# Altium PCB Battery Board PCB.PcbDoc
Units mil, origin at the board's own origin, x right, y up, seen from the top; angles counter-clockwise.
Board outline 3564.03 x 3686.03 mil, 2 copper layers (Top Layer, Bottom Layer); 45 components, 29 nets, 126 pads, 24 vias.
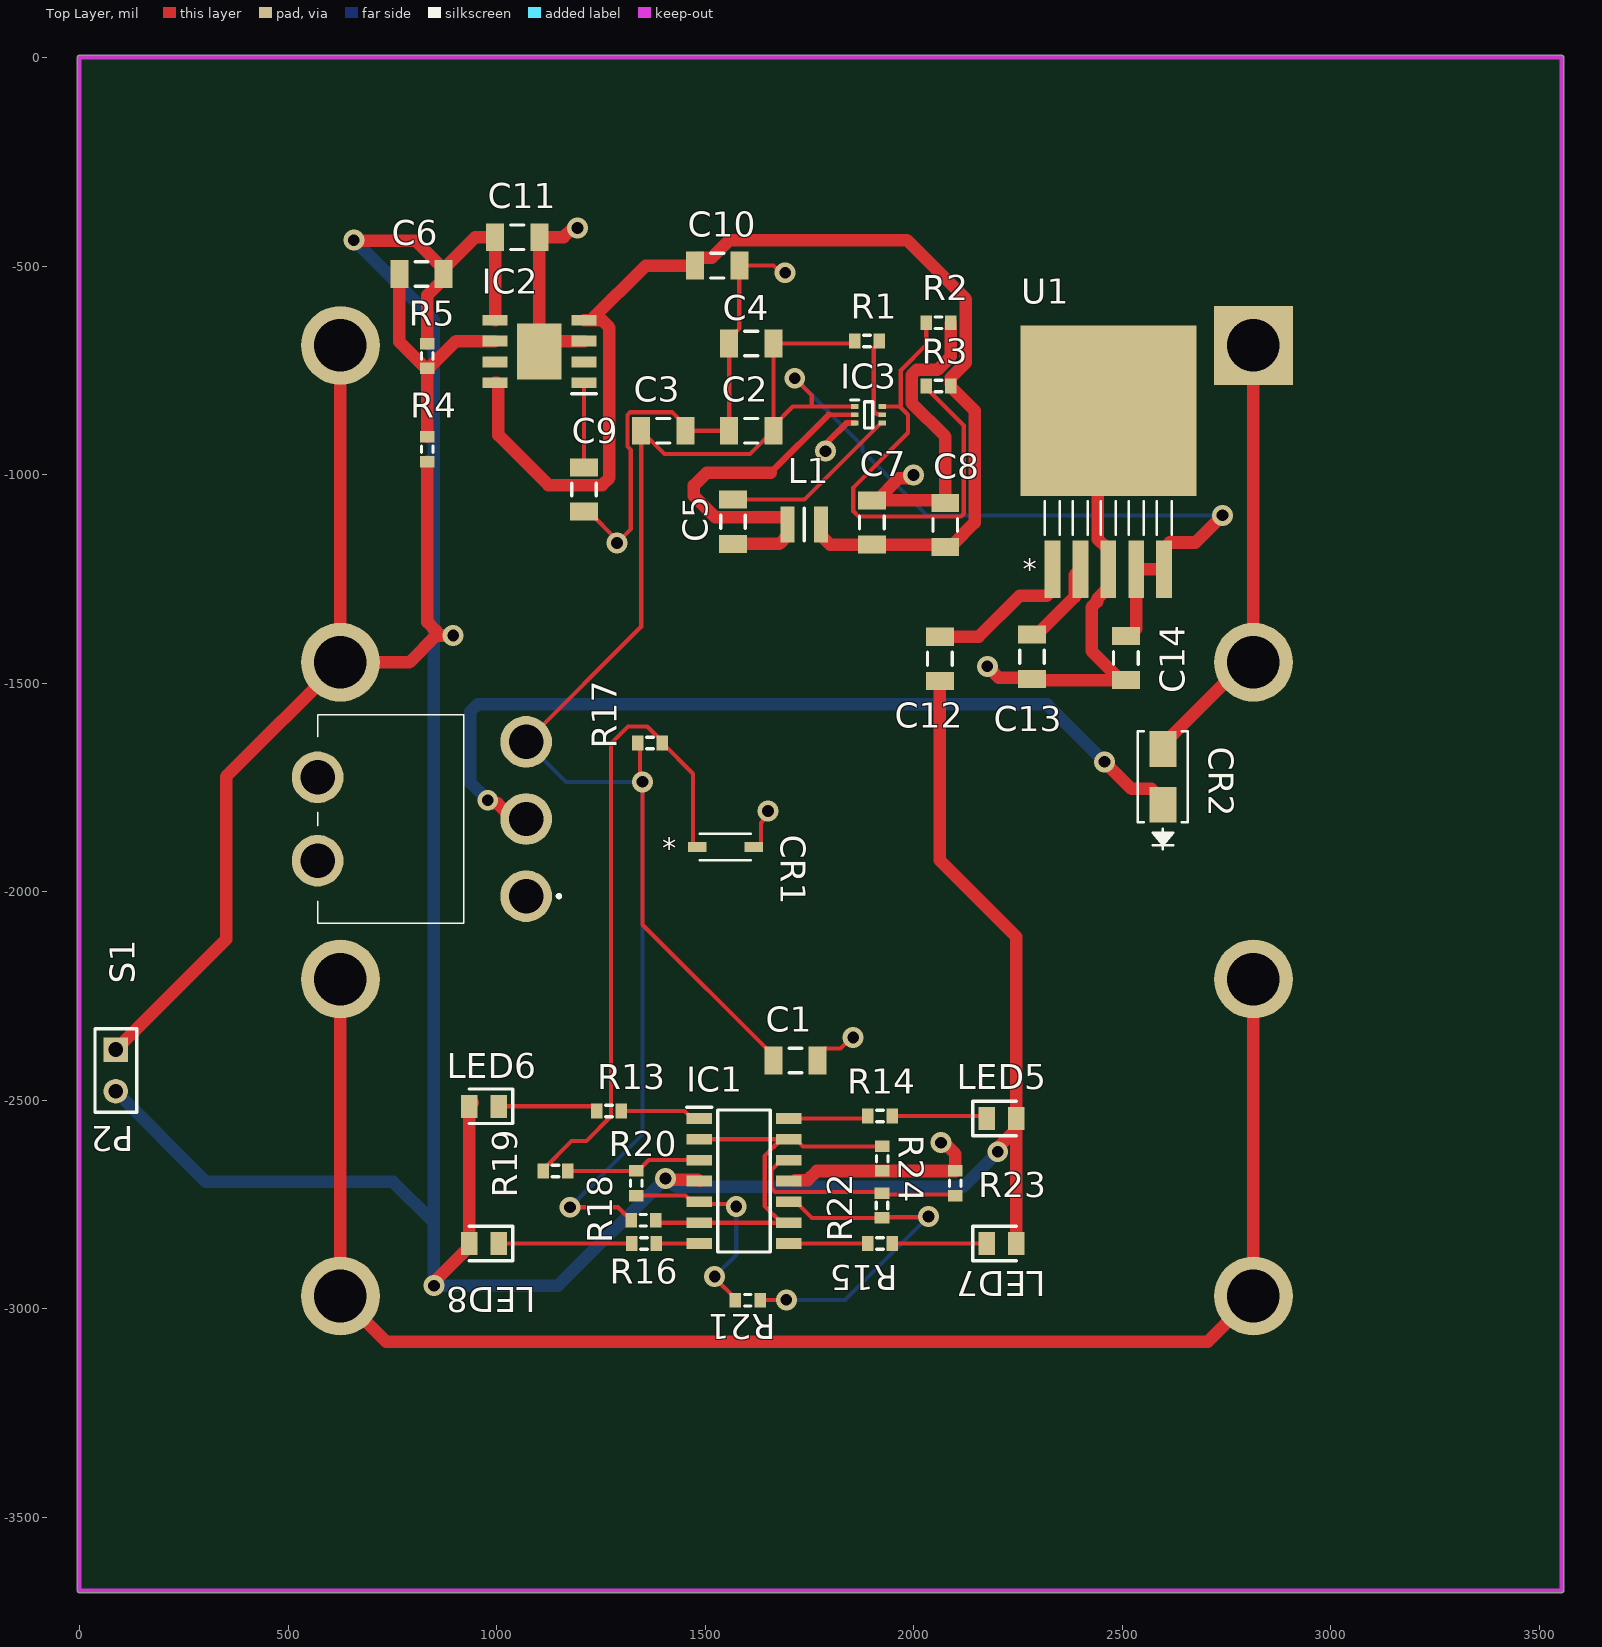
[diagram p0: Top Layer view]
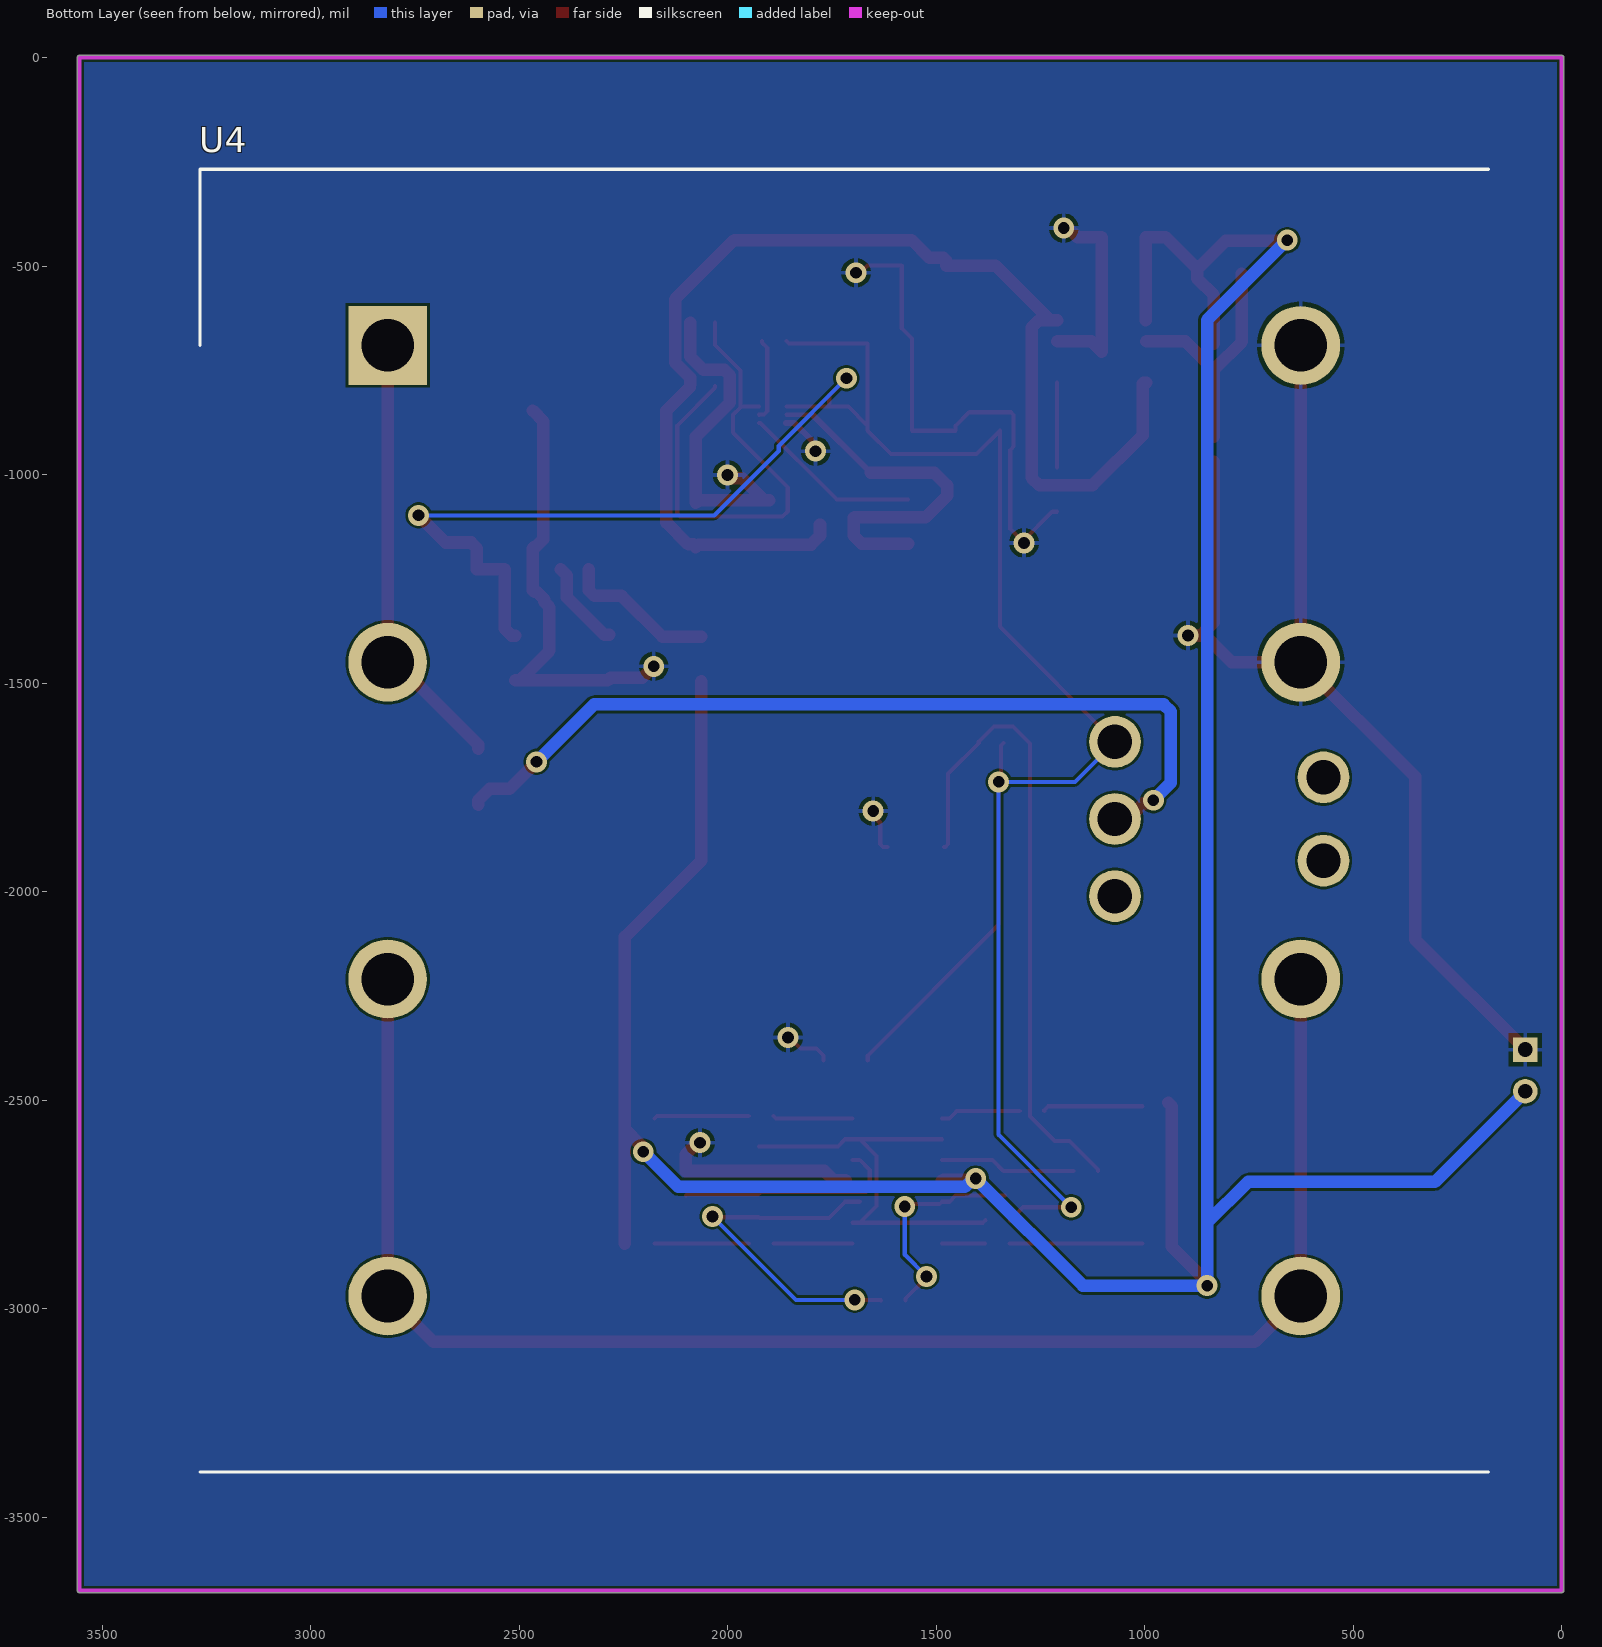
[diagram p1: Bottom Layer view, seen from below]

## Layer stack, top to bottom
Top Solder: solder mask 0.4, Solder Resist, Dk 3.5
Top Layer: signal copper 1.4
Dielectric 1: dielectric 12.6, FR-4, Dk 4.8
Bottom Layer: signal copper 1.4
Bottom Solder: solder mask 0.4, Solder Resist, Dk 3.5

## Board outline
0,-3681.01 cw(c0,-3676) -5.01,-3676 -5.01,0 cw(c0,0) 0,5.02 3554,5.02 cw(c3554,0) 3559.02,0 3559.02,-3676 cw(c3554,-3676) 3554,-3681.01

## Design rules (kind name [scope] priority, off if disabled: settings)
Clearance [All] p1: gap=6 ignorepadtopadclearanceinfootprint=FALSE
HoleSize [All] p1: absolutevalues=TRUE maxlimit=200 minlimit=1 maxpercent=80.000 minpercent=20.000
PolygonConnect [All] p1: connectstyle=Relief reliefconductorwidth=10 reliefentries=4 polygonreliefangle="90 Angle" airgapwidth=10
RoutingVias [All] p1: holewidth=28 width=50 viastyle="Through Hole" minholewidth=28 minwidth=50 maxholewidth=28 maxwidth=50
SilkToSolderMaskClearance [IsPad] p1: minsilkscreentomaskgap=2 clearancetoexposedcopper=TRUE
SolderMaskExpansion [All] p1: expansion=4 istentingtop=FALSE
Width [All] p1: maxlimit=36 minlimit=10 preferedwidth=10
28 further rules are at their usual default settings.

## Components (designator, comment, footprint, x,y, rotation, side; value= is the part's Value field where it differs from the comment)
C1 "Cap Semi" C1206 1716.85,-2405 r0 top value=1uF
C2 "Cap Semi" C1206 1611,-895 r180 top value=10uF
C3 "Cap Semi" C1206 1400,-895 r180 top value=10uF
C4 "Cap Semi" C1206 1611,-686 r0 top value=0.1uF
C5 "Cap Semi" C1206 1567,-1113 r90 top value=0.1uF
C6 "Cap Semi" C1206 820.15,-519 r0 top value=12nF
C7 "Cap Semi" C1206 1900,-1115 r270 top value=44uF
C8 "Cap Semi" C1206 2076,-1121 r270 top value=44uF
C9 "Cap Semi" C1206 1209.77,-1036 r270 top value=4.7uF
C10 "Cap Semi" C1206 1529,-499 r0 top value=4.7uF
C11 "Cap Semi" C1206 1049.85,-431 r0 top value=10uF
C12 "Cap Semi" C1206 2063,-1442.15 r90 top value=0.01uF
C13 "Cap Semi" C1206 2284,-1437.15 r270 top value=0.01uF
C14 "Cap Semi" C1206 2509,-1440 r270 top value=0.1uF
CR1 "BZT52C3V9-7-F" SOD123_DIO 1549,-1893 r0 top
CR2 "BYS10-25-E3/TR" DO-214AC_VIS 2598,-1725 r90 top
IC1 "LM324DR2G" SOIC127P600X175-14N 1593.28,-2694 r0 top
IC2 "LP3878MRX-ADJ_NOPB" SOIC127P600X170-9N 1103,-705 r180 top
IC3 "TPS562207SDRLR" SOTFL50P160X60-6N 1891.99,-856.69 r0 top
L1 "4.7uH" DFE2HCAH1R0MJ0L 1738,-1120 r0 top
LED5 "LTST-C170EKT" LEDC2012X120N 2211,-2544 r0 top
LED6 "LTST-C170EKT" LEDC2012X120N 970,-2515 r180 top
LED7 "LTST-C170EKT" LEDC2012X120N 2211,-2844 r0 top
LED8 "LTST-C170EKT" LEDC2012X120N 970,-2844 r180 top
P2 "Header 2" HDR1X2 87,-2379 r270 top
R1 "Res3" J1-0603 1888,-680 r0 top value=10K
R2 "Res3" J1-0603 2060,-636 r0 top value=10K
R3 "Res3" J1-0603 2059.53,-788 r180 top value=52K
R4 "Res3" J1-0603 834,-939.47 r270 top value=1K
R5 "Res3" J1-0603 834,-715.53 r270 top value=10K
R13 "Res3" J1-0603 1270,-2526 r0 top value="30 Ohm"
R14 "Res3" J1-0603 1919.53,-2538 r180 top value="30 Ohm"
R15 "Res3" J1-0603 1919.53,-2844 r180 top value="30 Ohm"
R16 "Res3" J1-0603 1353.47,-2844 r0 top value="30 Ohm"
R17 "Res3" J1-0603 1368,-1644 r180 top value=1K
R18 "Res3" J1-0603 1352,-2788 r180 top value=10K
R19 "Res3" J1-0603 1141.47,-2670.06 r180 top value=4.5K
R20 "Res3" J1-0603 1335,-2699.58 r90 top value=0.5K
R21 "Res3" J1-0603 1602.53,-2980 r180 top value=0.5K
R22 "Res3" J1-0603 1924,-2753 r270 top value=1.5K
R23 "Res3" J1-0603 2100,-2699.58 r270 top value=6K
R24 "Res3" J1-0603 1925,-2640.53 r90 top value=5K
S1 "100SP1T2B4M6QE" 100SP1T2B4M6QE 1071,-2011.04 r90 top
U1 "REG104FA-3.3/500" KTT5_TEX 2467,-847 r0 top
U4 "BK-18650-PC8" DIPS5561W300P1930L7884H2204Q8N 2815,-690.31 r180 bottom locked

## Footprints (in the part's own frame and the unit in brackets; to place one, negate y for a bottom-side part, rotate by r counter-clockwise, add the part's x,y. Pads: shape width x height; smd on the part's side, far side on the other; paste and mask are expansions set on the pad)
100SP1T2B4M6QE [mm]
  round 3.15 hole 2.1: 1(0,0) 2(4.7,0) 3(9.4,0) MH1(2.16,12.7) MH2(7.24,12.7)
  silkscreen extent -1.65,-2.1 11.05,12.7, body extent -1.65,-0.95 11.05,26.26, height 6.96
C1206 [mm] "Chip Capacitor, Body 3.2x1.6mm, IPC High Density"
  rect 1.1x1.7 smd: 1(-1.35,0) 2(1.35,0)
  silkscreen extent -0.4,-0.75 0.4,0.75, body extent -1.7,-0.9 1.7,0.9, height 1.3
DFE2HCAH1R0MJ0L [mm]
  rect 0.85x2.2 smd: 1(-1.025,0) 2(1.025,0)
  silkscreen extent 0,-1 0,1, body extent -1.25,-1 1.25,1, height 1.2
DIPS5561W300P1930L7884H2204Q8N [mm]
  rect 4.8x4.8 hole 3.2: 1(0,0)
  round 4.8 hole 3.2: 2(0,-19.3) 3(0,-38.6) 4(0,-57.9) 5(55.61,-57.9) 6(55.61,-38.6) 7(55.61,-19.3) 8(55.61,0)
  silkscreen extent -11.44,-68.62 67.04,10.72
DO-214AC_VIS [mil]
  rect 86x65 smd paste+0 mask+0: 1(-67,0) 2(67,0)
  silkscreen extent -174,-60 109,60, body extent -104,-55 104,55, height 92
HDR1X2 [mm] "Connector; Header; 2 Position"
  rect 1.5x1.5 hole 0.9: 1(0,0)
  round 1.5 hole 0.9: 2(2.54,0)
  silkscreen extent -1.27,-1.27 3.81,1.27
J1-0603 [mm] "Chip Resistor, Body 1.6x0.8mm, IPC High Density"
  rect 0.7x0.9 smd: 1(-0.75,0) 2(0.75,0)
  silkscreen extent -0.2,-0.35 0.2,0.35, body extent -0.85,-0.48 0.85,0.48, height 0.9
KTT5_TEX [mil]
  rect 38x138 smd paste+0 mask+0: 1(-133.86,-380) 2(-66.93,-380) 3(0,-380) 4(66.93,-380) 5(133.86,-380)
  rect 422x408 smd paste+0 mask+0: 6(0,0)
  silkscreen extent -152,-297 152,-217, body extent -210,-293 210,190, height 67
LEDC2012X120N [mm]
  rect 1x1.4 smd: 1(-0.9,0) 2(0.9,0)
  silkscreen extent -1.75,-1.05 0.9,1.05
SOD123_DIO [mm]
  rect 1.111x0.601 smd paste+0 mask+0: 1(-1.725,0) 2(1.725,0)
  silkscreen extent -1.55,-0.8 1.55,0.8, body extent -1.92,-0.67 1.92,0.67, height 0.81
SOIC127P600X170-9N [mm]
  rect 1.525x0.65 smd: 1(-2.712,1.905) 2(-2.712,0.635) 3(-2.712,-0.635) 4(-2.712,-1.905) 5(2.712,-1.905) 6(2.712,-0.635) 7(2.712,0.635) 8(2.712,1.905)
  rect 2.71x3.4 smd: 9(0,0)
  silkscreen extent -3.47,2.58 -1.95,2.58, body extent -3.01,-2.45 3.01,2.45, height 1.57
SOIC127P600X175-14N [mm]
  rect 1.55x0.65 smd: 1(-2.725,3.81) 2(-2.725,2.54) 3(-2.725,1.27) 4(-2.725,0) 5(-2.725,-1.27) 6(-2.725,-2.54) 7(-2.725,-3.81) 8(2.725,-3.81) 9(2.725,-2.54) 10(2.725,-1.27) 11(2.725,0) 12(2.725,1.27) 13(2.725,2.54) 14(2.725,3.81)
  silkscreen extent -3.5,-4.33 1.6,4.48, body extent -3,-4.33 3,4.33, height 1.75
SOTFL50P160X60-6N [mm]
  rect 0.475x0.3 smd: 1(-0.838,0.5) 2(-0.838,0) 3(-0.838,-0.5) 4(0.838,-0.5) 5(0.838,0) 6(0.838,0.5)
  silkscreen extent -1.07,-0.8 0.25,0.9, body extent -0.8,-0.8 0.8,0.8, height 0.6

## Part data
C1 C2 C3 C4 C5 C6 C7 C8 C9 C10 C11 C12 C13 C14: "Capacitor (Semiconductor SIM Model)", LatestRevisionDate=29-May-2009, LatestRevisionNote="IPC-7351 Footprint Added.", PackageDescription="Chip Capacitor", PackageReference=C1206, Published=8-Jun-2000, Publisher="Altium Limited"
CR1: "No Description Available", Mfr_Name="Diodes Inc", Copyright="Copyright (C) 2022 Ultra Librarian. All rights reserved.", Digi-Key_Part_Number_1=BZT52C3V9-FDICT-ND, Digi-Key_Part_Number_2=BZT52C3V9-FDIDKR-ND, Digi-Key_Part_Number_3=BZT52C3V9-FDITR-ND, Manufacturer_Part_Number=BZT52C3V9-7-F, RefDes=RefDes, Type=DEV
CR2: "No Description Available", Mfr_Name=Vishay, Copyright="Copyright (C) 2022 Ultra Librarian. All rights reserved.", Digi-Key_Part_Number_1=BYS10-25-E3/GICT-ND, Digi-Key_Part_Number_2=BYS10-25-E3/GIDKR-ND, Digi-Key_Part_Number_3=BYS10-25-E3/GITR-ND, Manufacturer_Part_Number=BYS10-25-E3/TR, RefDes=RefDes, Type=DEV
IC1: "Integrated Circuit", Manufacturer_Name=onsemi, Mouser Part Number=863-LM324DR2G, Arrow Part Number=LM324DR2G, Arrow Price/Stock=https://www.arrow.com/en/products/lm324dr2g/on-semiconductor?region=europe, Datasheet Link=http://www.onsemi.com/pub/Collateral/LM324-D.PDF, Height=1.75mm, Manufacturer_Part_Number=LM324DR2G, Mouser Price/Stock=https://www.mouser.co.uk/ProductDetail/onsemi/LM324DR2G?qs=2OtswVQKCOEcq0L2uFhs6w%3D%3D
IC2: "Integrated Circuit", Manufacturer_Name="Texas Instruments", Manufacturer_Part_Number=LP3878MRX-ADJ/NOPB, Mouser2 Part Number=926-LP3878MRXADJNOPB, Datasheet Link=http://www.ti.com/lit/gpn/lp3878-adj, Height=1.7mm, Mouser2 Price/Stock=https://www.mouser.com/Search/Refine.aspx?Keyword=926-LP3878MRXADJNOPB
IC3: "Integrated Circuit", Manufacturer_Name="Texas Instruments", Datasheet Link=https://www.ti.com/lit/gpn/tps562207s, Height=0.6mm, Manufacturer_Part_Number=TPS562207SDRLR
L1: library part DFE252012PD-4R7M=P2, "Inductor", Manufacturer_Name="Murata Electronics", Manufacturer_Part_Number=DFE252012PD-4R7M=P2, Mouser2 Part Number=81-DFE252012PD4R7MP2, Datasheet Link=https://componentsearchengine.com//DFE252012PD-4R7M=P2.pdf, Height=1.2mm, Mouser2 Price/Stock=https://www.mouser.com/Search/Refine.aspx?Keyword=81-DFE252012PD4R7MP2
LED5 LED6 LED7 LED8: "LED", Manufacturer_Name=Lite-On, Mouser Part Number=859-LTST-C170EKT, Arrow Part Number=LTST-C170EKT, Arrow Price/Stock=https://www.arrow.com/en/products/ltst-c170ekt/lite-on-technology, Datasheet Link=https://media.digikey.com/pdf/Data%20Sheets/Lite-On%20PDFs/LTST-C170EKT.pdf, Height=1.2mm, Manufacturer_Part_Number=LTST-C170EKT, Mouser Price/Stock=https://www.mouser.co.uk/ProductDetail/Lite-On/LTST-C170EKT?qs=0hBTvMLoVZ04yIRvO1DUlw%3D%3D
P2: "Header, 2-Pin", LatestRevisionDate=17-Jul-2002, LatestRevisionNote="Re-released for DXP Platform.", Publisher="Altium Limited"
R1 R2 R3 R4 R5 R13 R14 R15 R16 R17 R18 R19 R20 R21 R22 R23 R24: "Resistor", LatestRevisionDate=29-May-2009, LatestRevisionNote="IPC-7351 Footprint Added.", PackageDescription="Chip Resistor", PackageReference=J1-0603, Published=8-Jun-2000, Publisher="Altium Limited"
S1: "Switch", Manufacturer_Name=E-Switch, Mouser Part Number=612-100-A2461, Datasheet Link=http://spec_sheets.e-switch.com/specs/T111069.pdf, Height=6.86mm, Manufacturer_Part_Number=100SP1T2B4M6QE, Mouser Price/Stock=https://www.mouser.co.uk/ProductDetail/E-Switch/100SP1T2B4M6QE?qs=rR7wk9eDIwq%252BdlBXTZsQkg%3D%3D
U1: "No Description Available", Mfr_Name="Texas Instruments", Copyright="Copyright (C) 2022 Ultra Librarian. All rights reserved.", Digi-Key_Part_Number_1=2156-REG104FA-3.3/500-ND, Digi-Key_Part_Number_2=2156-REG104FA-3.3/500-TI-ND, Digi-Key_Part_Number_3=296-REG104FA-3.3/500CT-ND, Digi-Key_Part_Number_4=296-REG104FA-3.3/500DKR-ND, Digi-Key_Part_Number_5=296-REG104FA-3.3/500TR-ND, Digi-Key_Part_Number_6=REG104FA-3.3CT-ND, Digi-Key_Part_Number_7=REG104FA-3.3DKR-ND, Digi-Key_Part_Number_8=REG104FA-3.3TR-ND, Manufacturer_Part_Number=REG104FA-3.3/500, RefDes=RefDes, Type=DEV
U4: "Undefined or Miscellaneous", Manufacturer_Name="Memory Protection Devices", Datasheet Link=http://www.memoryprotectiondevices.com/datasheets/BK-18650-PC8-datasheet.pdf, Height=22.04mm, Manufacturer_Part_Number=BK-18650-PC8

## Via types
v1: diameter 50, hole 28, Top Layer to Bottom Layer, tented both sides, 14 vias
v2: diameter 50, hole 28, Top Layer to Bottom Layer, 10 vias

## Nets (pads, with @x,y where several pads share a name; then routed paths per layer and width w, separated by ;. In a path a pad name is that pad's centre, name@x,y a point inside that pad or via, vN(x,y) a via of type N, cw(c..) or ccw(c..) an arc to the next point about the centre after c; other vN are vias at no path point)
GND: C1.2 C2.2 C3.1 C4.1 C7.1 C8.1 C9.2 C10.2 C11.2 C13.2 C14.2 CR1.2 IC1.11 IC2.3 IC2.9 IC3.3 P2.1 R2.2 R4.2 R23.1 R24.1 U1.3 U1.6 U4.7 U4.8 | length 7050.1
  Top Layer w10: C9.2 1221.58,-1089.15 1289,-1156.57 v2@1289,-1159.14 ; v2(1289,-1164) v2@1289,-1159.14 ; CR1.2 1626.96,-1893 1633.79,-1886.17 1633.79,-1835.04 1651,-1817.82 v2(1651,-1807) ; v2(1692,-516) 1681.18,-516 1664.18,-499 C10.2 1582.15,-649.89 1557.85,-674.19 C4.1 C2.2 C3.1 1453.15,-883.19 1420.5,-850.54 1320.64,-850.54 1314.2,-856.98 1314.2,-933.02 1322,-940.82 1322,-1131 1293.86,-1159.14 v2@1289,-1159.14 ; C1.2 1770,-2393.19 1786.65,-2376.54 1824.97,-2376.54 1851.5,-2350 v2(1855,-2350)
  Top Layer w15: v2(1789,-944) 1796.65,-936.35 1796.65,-919.35 1839.63,-876.37 IC3.3
  Top Layer w30: P2.1 351.46,-2114.54 351.46,-1724.33 U4.7 ; U4.8 U4.7 ; R4.2 834,-1354.18 855,-1375.18 855,-1386 ; v1(896,-1386) 855,-1386 ; v2(1194,-409) 1183.18,-409 1161.18,-431 C11.2 IC2.9 1128,-680 IC2.3 ; IC1.11@1716.08,-2691.8 1746.2,-2691.8 1767.94,-2670.06 R24.1 ; C7.1 C7.1@1911.81,-1061.85 ; R24.1@1927.72,-2670.06 R23.1 2100,-2629.57 2076.25,-2605.83 2069.83,-2605.83 v1(2066,-2602) ; v2(2000,-1001) 1992.35,-1008.65 1965.01,-1008.65 C7.1@1911.81,-1061.85 ; R2.2 2089.53,-716.87 2057.11,-749.28 2007.52,-749.28 1995.22,-761.59 1995.22,-828.22 2076,-909 C8.1 2070,-1061.85 C7.1@1911.81,-1061.85 ; v1(2177,-1460) 2177,-1460.26 2204.57,-1487.83 2281.54,-1487.83 C13.2 2286.85,-1493.15 C14.2@2497.19,-1493.15 ; U1.6 2442.19,-871.81 2442.19,-1155.43 2459.77,-1173 2463,-1173 2467,-1177 U1.3 2467,-1277 2463,-1281 2457.64,-1281 2440.07,-1298.57 2440.07,-1304.7 2427,-1317.77 2427,-1422.96 2490.54,-1486.5 C14.2@2497.19,-1493.15 ; C14.2 C14.2@2497.19,-1493.15 ; U4.7 790.84,-1450.16 855,-1386
NetC1_1: C1.1 C2.1 C3.2 C4.2 C14.1 IC3.1 R1.1 R17.2 R18.2 S1.3 U1.4 U1.5 | length 6031
  Top Layer w10: S1.3 1346.85,-1365.11 C3.2 1402.85,-951 1608.15,-951 C2.1 C2.1@1664.15,-883.19 ; v2(1176,-2757) 1291.47,-2757 1309.76,-2775.28 1313.69,-2775.28 1322.47,-2784.06 R18.2 ; R17.2 1344.24,-1649.76 1344.24,-1731.24 v2(1350,-1737) 1350,-2079.49 1663.7,-2393.19 C1.1 ; v1(1715,-769) 1756.05,-810.05 1756.05,-837 ; R1.1 1852.47,-686 C4.2 C2.1@1664.15,-883.19 ; IC3.1 1761,-837 1710.34,-837 C2.1@1664.15,-883.19
  Top Layer w30: C14.1 2517.28,-1386.85 2533.93,-1370.2 U1.4 U1.5 2600.86,-1177 2614.86,-1163 2676,-1163 v1(2741,-1098)
  Bottom Layer w10: S1.3 1167.04,-1737 v2(1350,-1737) 1350,-2583 v2(1176,-2757) ; v1(1715,-769) 1877.33,-931.33 1877.33,-943.33 2032,-1098 v1(2741,-1098)
NetC5_1: C5.1 IC3.2 L1.1 | length 907.8
  Top Layer w10: 1796.32,-856.69 IC3.2
  Top Layer w15: 1657,-996 1796.32,-856.69
  Top Layer w30: C5.1 1678.07,-1166.15 1697.65,-1146.57 1697.65,-1104.24 1695.91,-1102.5 1524.84,-1102.5 1473.5,-1051.17 1473.5,-1026.32 1503.82,-996 1657,-996
NetC5_2: C5.2 IC3.4 | length 434
  Top Layer w10: C5.2 1738.06,-1059.85 1921.54,-876.37 IC3.4
NetC6_1: C6.1 IC2.6 R4.1 R5.2 | length 610.2
  Top Layer w30: C6.1 767,-681.99 830.06,-745.06 R5.2 ; R4.1 R5.2 ; IC2.6 902.99,-680 837.94,-745.06 R5.2
NetC7_2: C7.2 C8.2 C10.1 IC2.4 IC2.8 L1.2 R3.1 | length 2925.7
  Top Layer w30: IC2.8 1002.2,-780 1004.4,-782.2 1004.4,-905.4 1124.5,-1025.5 1253.05,-1025.5 1270.62,-1007.93 1270.62,-647.57 1253.05,-630 IC2.4@1227,-630 ; IC2.4 IC2.4@1227,-630 ; L1.2 1778.35,-1146.57 1799.93,-1168.15 C7.2 2070,-1168.15 C8.2 2082.65,-1167.5 2094.46,-1167.5 2146.46,-1115.5 2146.46,-846.91 R3.1@2090.28,-790.72 ; R3.1@2089.06,-784.06 2089.06,-768.25 2125.53,-731.78 2125.53,-579.53 1984,-438 1558.33,-438 1515.8,-480.54 1482.5,-480.54 1475.85,-487.19 C10.1 1358,-499 IC2.4@1227,-630
NetC9_1: C9.1 IC2.1 | length 202.9
  Top Layer w10: C9.1 IC2.1
NetC12_2: C12.2 U1.1 | length 366.5
  Top Layer w30: C12.2 2156.3,-1389 2254.3,-1291 2319.14,-1291 2333.14,-1277 U1.1
NetC13_1: C13.1 U1.2 | length 212
  Top Layer w30: C13.1 2295.81,-1384 2386.07,-1293.74 2386.07,-1241 U1.2
NetCR1_1: CR1.1 R17.1 R19.2 | length 1557.5
  Top Layer w10: R19.2 1111.94,-2666.12 1180.01,-2598.06 1215.47,-2598.06 1274.75,-2538.78 1274.75,-1644.88 1315.63,-1604 1361.46,-1604 1397.53,-1640.06 R17.1 1471.04,-1717.51 1471.04,-1886.17 1477.87,-1893 CR1.1
NetCR2_1: CR2.1 S1.2 | length 2114.7
  Top Layer w30: v1(979,-1781) 986.65,-1788.65 1002.8,-1788.65 1040.15,-1826 S1.2 ; v1(2458,-1689) 2523,-1754 2570.5,-1754 2598,-1781.5 CR2.1
  Bottom Layer w30: v1(979,-1781) 937,-1739 937,-1568.57 954.57,-1551 2320,-1551 v1(2458,-1689)
NetCR2_2: CR2.2 U4.1 U4.2 | length 1069.1
  Top Layer w30: CR2.2 2598,-1647.5 2795.34,-1450.16 U4.2 U4.1
NetIC1_1: IC1.1 R13.2 | length 193.9
  Top Layer w10: R13.2 1450.28,-2526 1468.28,-2544 IC1.1
NetIC1_2: IC1.2 IC1.6 IC1.9 IC1.13 R18.1 R24.2 | length 1000.5
  Top Layer w10: R18.1 1387.53,-2794 IC1.6 IC1.9@1682.85,-2794 ; IC1.2 IC1.13@1682.85,-2594 ; IC1.9 IC1.9@1682.85,-2794 ; R24.2 1735.28,-2611 1718.28,-2594 IC1.13 IC1.13@1682.85,-2594 ; IC1.9@1682.85,-2794 1643.06,-2754.2 1643.06,-2633.8 IC1.13@1682.85,-2594
NetIC1_3: IC1.3 R19.1 R20.2 | length 325.8
  Top Layer w10: R19.1 R20.2 1338.94,-2670.06 1364.99,-2644 IC1.3
NetIC1_5: IC1.5 R20.1 R21.2 | length 518
  Top Layer w10: R20.1 1453.39,-2729.11 1468.28,-2744 IC1.5 1491.5,-2749.5 1569.5,-2749.5 v1(1575,-2755) ; v1(1523,-2923) 1523,-2926.06 1573,-2976.06 R21.2
  Bottom Layer w10: v1(1523,-2923) 1575,-2871 v1(1575,-2755)
NetIC1_7: IC1.7 R16.2 | length 103
  Top Layer w10: R16.2 IC1.7
NetIC1_8: IC1.8 R15.2 | length 189.4
  Top Layer w10: IC1.8 R15.2
NetIC1_10: IC1.10 R21.1 R22.2 | length 857.8
  Top Layer w10: R21.1 1633.06,-2979 v1(1695,-2979) ; IC1.10@1682.85,-2744 IC1.10 1718.28,-2744 1756.81,-2782.53 R22.2 1925.76,-2780.76 2034.24,-2780.76 v1(2036,-2779)
  Bottom Layer w10: v1(1695,-2979) 1836,-2979 v1(2036,-2779)
NetIC1_12: IC1.12 R22.1 R23.2 | length 547.2
  Top Layer w10: IC1.12 1682.85,-2644 1659.06,-2667.8 1659.06,-2711.35 1667.91,-2720.2 1920.73,-2720.2 R22.1 ; R22.1@1927.94,-2723.47 R22.1 ; R23.2 2097.18,-2726.29 1926.82,-2726.29 R22.1
NetIC1_14: IC1.14 R14.2 | length 191.9
  Top Layer w10: IC1.14 1884,-2544 R14.2
NetIC3_5: IC3.5 R1.2 | length 197
  Top Layer w10: R1.2 1917.53,-683.94 1904.63,-696.83 1904.63,-847.46 1912.95,-855.78 1924.08,-855.78 IC3.5
NetIC3_6: IC3.6 R2.1 R3.2 | length 1199.7
  Top Layer w10: IC3.6 1969.22,-837 ; R3.2 2030,-791.94 2120.46,-882.4 2120.46,-1094.06 2114.02,-1100.5 1867.98,-1100.5 1855.54,-1088.06 1855.54,-1031.14 1986.89,-899.78 1986.89,-856.66 1969.22,-838.99 1969.22,-750.82 2030.24,-689.8 2030.24,-636.24 R2.1
NetLED5_1: LED5.1 R14.1 | length 229
  Top Layer w10: R14.1 2169.57,-2538 LED5.1
NetLED6_1: LED6.1 R13.1 | length 240.9
  Top Layer w10: LED6.1 1231.69,-2515 1240.47,-2523.78 R13.1
NetLED7_1: LED7.1 R15.1 | length 226.5
  Top Layer w10: R15.1 LED7.1
NetLED8_1: LED8.1 R16.1 | length 318.5
  Top Layer w10: LED8.1 R16.1
NetU4_3: U4.3 U4.4 U4.5 U4.6 | length 3800.3
  Top Layer w30: U4.6 U4.5 735.79,-3080 2704.84,-3080 U4.4 U4.3
VCC: C6.2 C11.1 C12.1 IC1.4 IC2.5 LED5.2 LED6.2 LED7.2 LED8.2 P2.2 R5.1 | length 7832
  Top Layer w30: v2(658,-438) 659,-439 805.11,-439 C6.2@873.3,-507.19 ; R5.1 834,-570.11 873.3,-530.81 C6.2 C6.2@873.3,-507.19 ; v1(850,-2945) 853.83,-2941.17 853.83,-2932.61 934.57,-2851.87 LED6.2 LED6.2@943,-2506.57 ; IC2.5@996.7,-629.53 C11.1 949.49,-431 C6.2@873.3,-507.19 ; v1(1405,-2688) 1408,-2691 1483,-2691 IC1.4 ; C12.1 2063,-1924.98 2246.43,-2108.41 LED5.2 LED5.2@2246.43,-2569.57 ; v1(2202,-2624) 2206.25,-2619.75 2206.25,-2609.75 LED5.2@2246.43,-2569.57 ; LED7.2 LED5.2@2246.43,-2569.57
  Bottom Layer w30: P2.2 303.87,-2695.87 751.87,-2695.87 850,-2794 ; v2(658,-438) 850,-630 850,-2794 ; v1(2202,-2624) 2118,-2708 1430.86,-2708 1410.86,-2688 v1(1405,-2688) 1148,-2945 v1(850,-2945) 850,-2794
pads on no net: IC2.2 IC2.7 S1.1 S1.MH1 S1.MH2

## Polygon pours and split planes (outlines as drawn)
GND on Bottom Layer "GND_L02_P000" (solid, pour order 0): 5,-5 3549,-5 3549,-3671 5,-3671

## Keep-outs
Keep-Out Layer:
  lines w10: 0,-3676 3554,-3676 3554,0 0,0 0,-3676

## Silkscreen, mask and mechanical layers (free items; w line width, h text height)
Mechanical 1:
  the board outline again, w0.01

## Text inside footprints (layer, text, board x,y; h text height)
CR1: Top Overlay "*" at 1397,-1921 h50; Mechanical 13 "*" at 1490.4,-1918 h50
U1: Top Overlay "*" at 2262.18,-1252 h50; Mechanical 13 "*" at 2320.64,-1052 h50